# Altium PCB PCB.PcbDoc (part 1 of 2)
Units mm, origin at the board's own origin, x right, y up, seen from the top; angles counter-clockwise.
Board outline 25 x 40 mm, 4 copper layers (L1-Sig, L2-Gnd, L3-Gnd, L4-Sig), stack 1.591 mm thick; 54 components, 44 nets, 207 pads, 194 vias.
Unrouted connection lines stored in the file: 1.
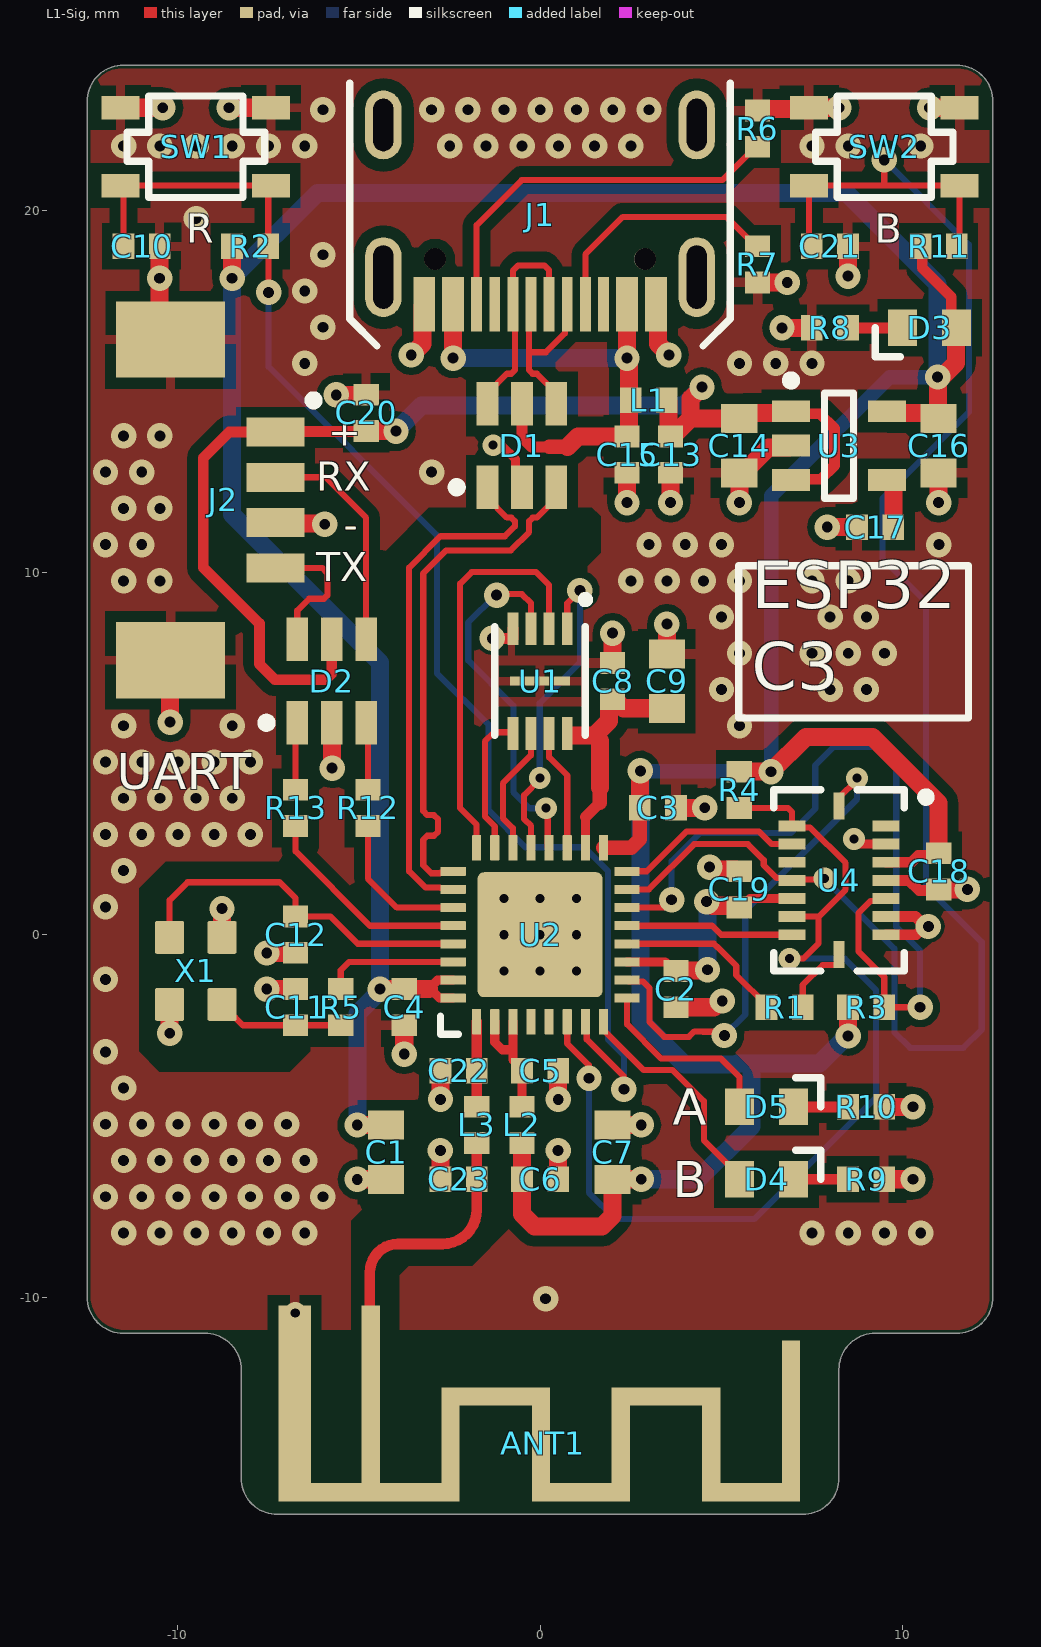
[diagram p0: L1-Sig view]
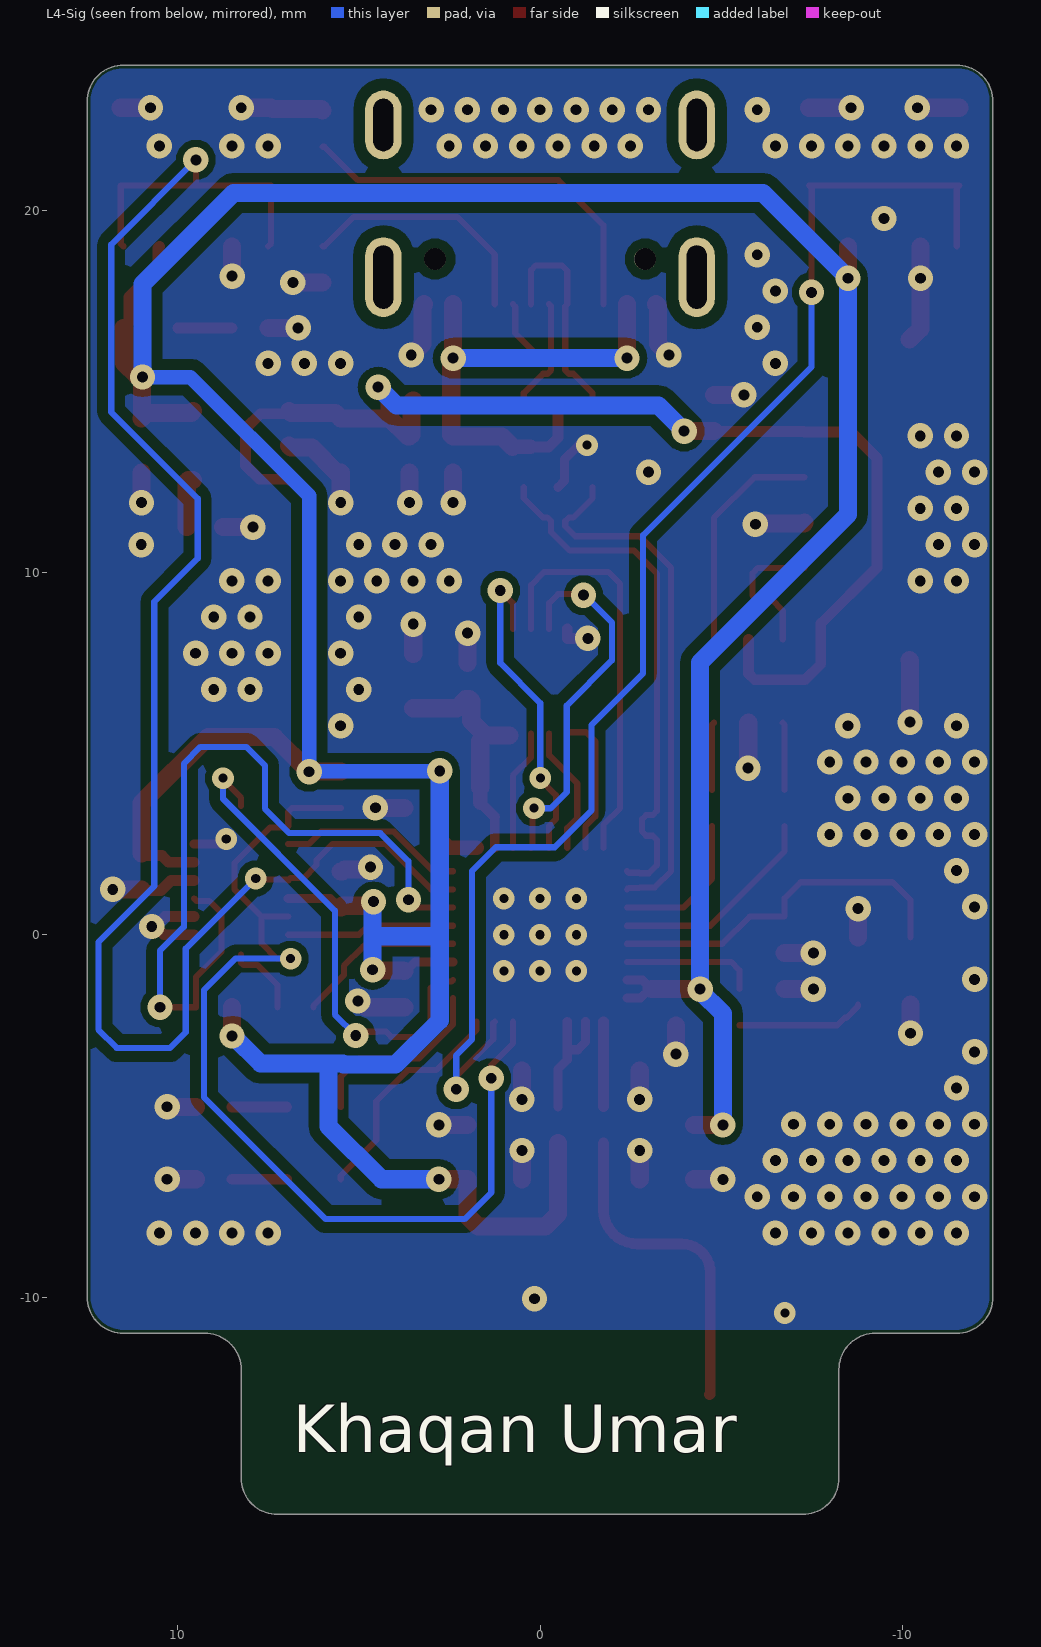
[diagram p1: L4-Sig view, seen from below]
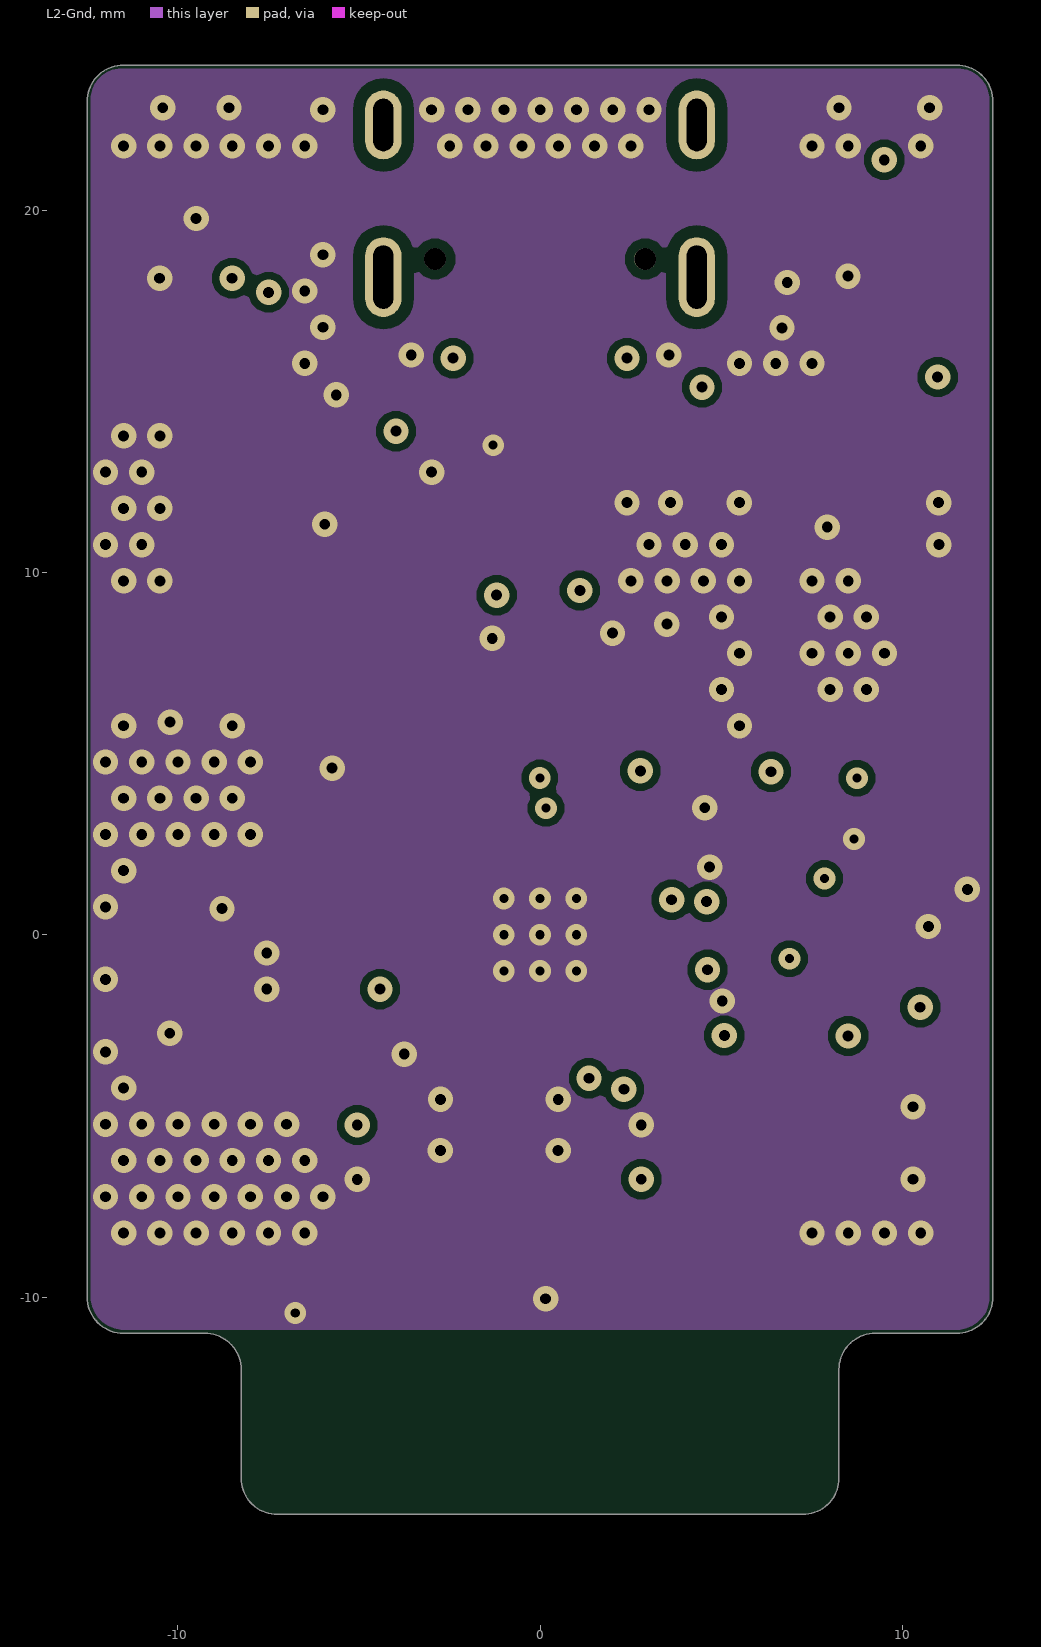
[diagram p2: L2-Gnd]
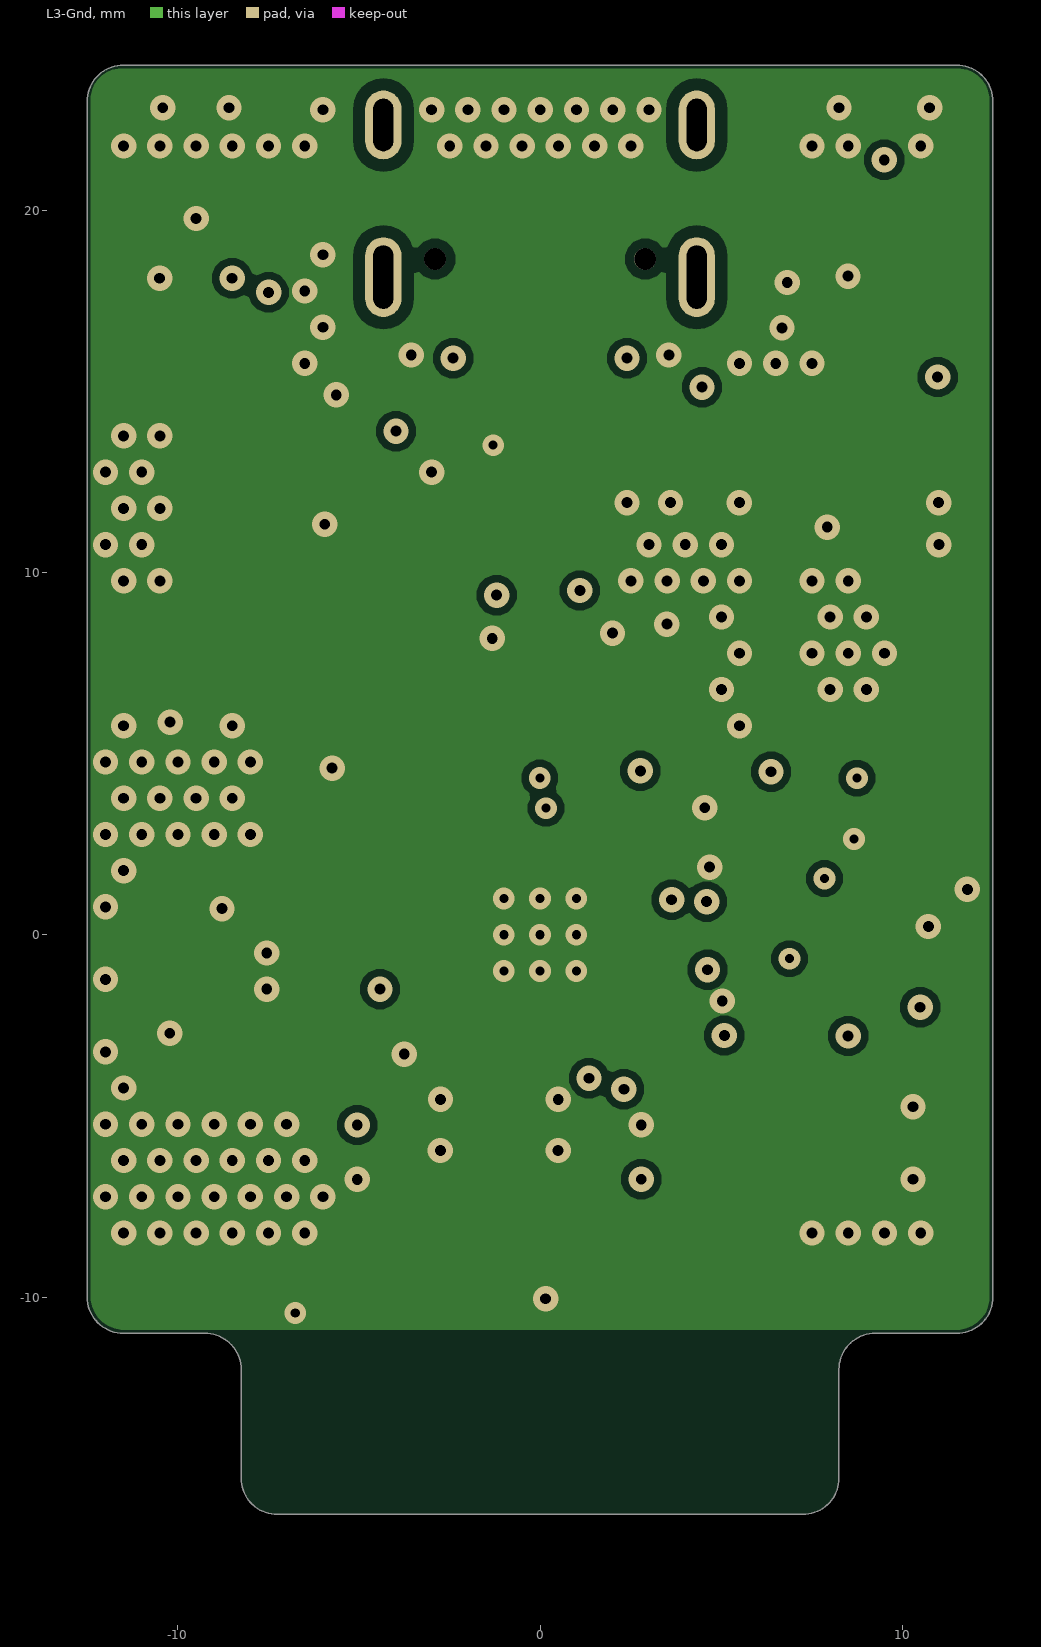
[diagram p3: L3-Gnd]
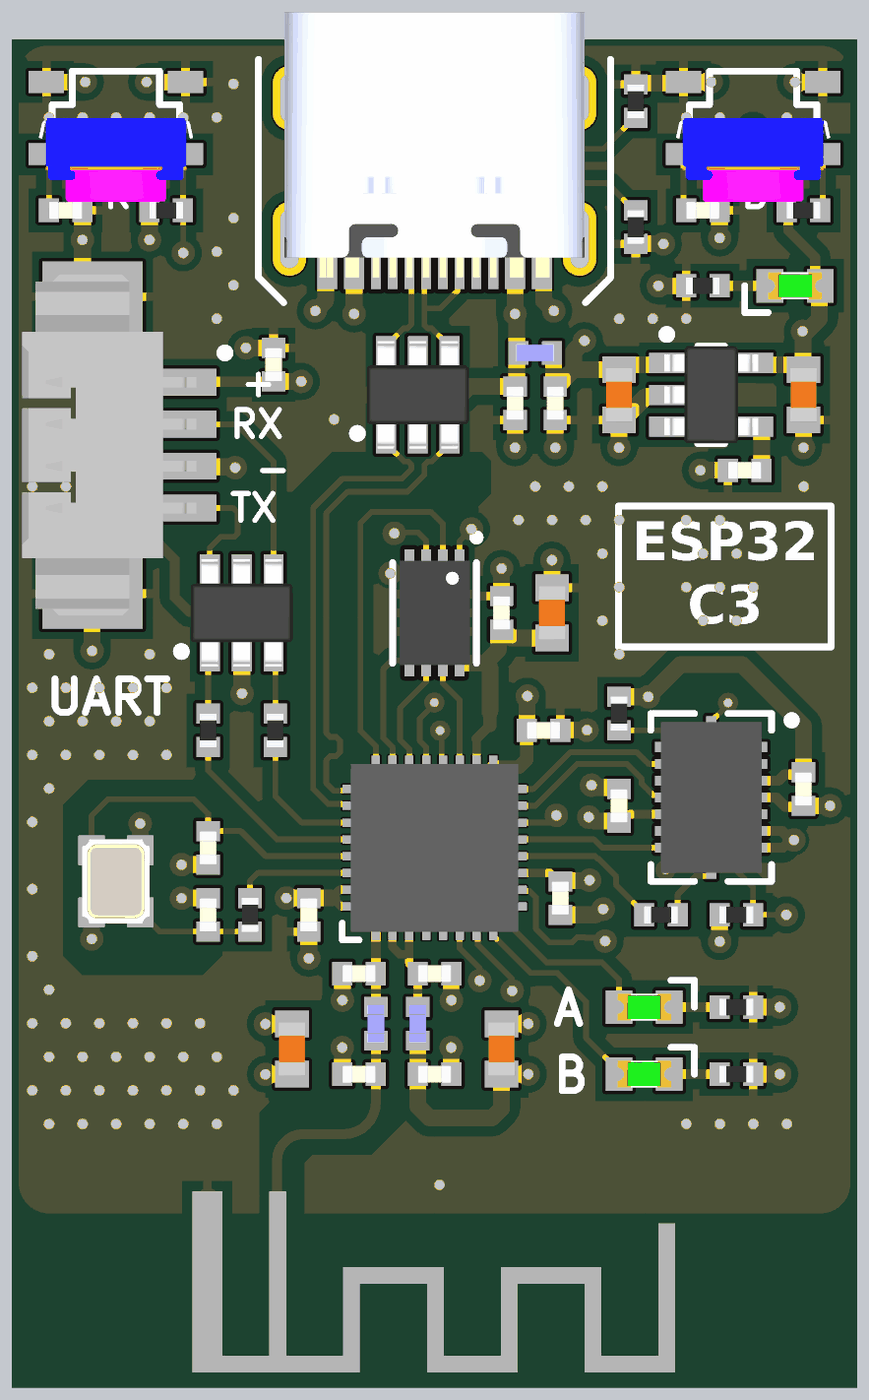
[diagram p4: 3D render of the assembled board from above, using the file's embedded part models]

## Layer stack, top to bottom
Top Solder: solder mask 0.0254, SM-001, Dk 4
L1-Sig: signal copper 0.035
Dielectric 1: prepreg 0.2104, PP-017, Dk 4.6
L2-Gnd: signal copper 0.0175
Dielectric 3: core 1.065, Core-039, Dk 4.6
L3-Gnd: signal copper 0.0175
Dielectric 5: prepreg 0.2104, PP-017, Dk 4.6
L4-Sig: signal copper 0.035
Bottom Solder: solder mask 0.0254, SM-001, Dk 4

## Board outline
-8.25,-15 -8.25,-12 ccw(c-9.25,-12) -9.25,-11 -11.5,-11 cw(c-11.5,-10) -12.5,-10 -12.5,23 cw(c-11.5,23) -11.5,24 11.5,24 cw(c11.5,23) 12.5,23 12.5,-10 cw(c11.5,-10) 11.5,-11 9.25,-11 ccw(c9.25,-12) 8.25,-12 8.25,-15 cw(c7.25,-15) 7.25,-16 -7.25,-16 cw(c-7.25,-15)

## Design rules (kind name [scope] priority, off if disabled: settings)
Clearance [All] p1: gap=0.15 ignorepadtopadclearanceinfootprint=FALSE except(0.2: Arc-Via Track-Via Via-Fill Via-Poly Via-Region; 0.254: Arc-Hole Track-Hole SMDPad-Hole THPad-Hole Via-Via Via-Hole Fill-Hole Poly-Hole Region-Hole; 0.3: Arc-Fill Arc-Poly Arc-Region Track-Fill Track-Poly Track-Region SMDPad-Fill SMDPad-Poly SMDPad-Region Fill-Fill Fill-Poly Fill-Region Poly-Poly Poly-Region Region-Region; 0.33: Arc-THPad Track-THPad THPad-Fill THPad-Poly THPad-Region)
DiffPairsRouting [InDifferentialPairClass('DIFF90')] p1: maxlimit=0.22 minlimit=0.127 mostfreqgap=0.22 toplayer_mingap=0.22 toplayer_minwidth=0.17 toplayer_maxwidth=0.17 toplayer_prefwidth=0.17 bottomlayer_mingap=0.22 bottomlayer_minwidth=0.17 bottomlayer_maxwidth=0.17 bottomlayer_prefwidth=0.17 impedanceprofiledriven=TRUE impedanceprofileid={43D1026E-E55F-46A2-96F1-A78F2004043C} impedanceprofilevalue=90.000000 maxuncoupledlength=12.7
MatchedLengths DiffPair_MatchedLengths [InDifferentialPair ('MCU_USB_D')] p1: tolerance=25.4 checknetsindiffpair=FALSE checkdiffpairvsdiffpair=TRUE checkxsignals=TRUE checkothers=TRUE
PolygonConnect [All] p1: thpad.connectstyle=Relief thpad.reliefconductorwidth=0.254 thpad.reliefentries=4 thpad.polygonreliefangle="90 Angle" thpad.airgapwidth=0.3 smdpad.connectstyle=Relief smdpad.reliefconductorwidth=0.254 smdpad.reliefentries=4 smdpad.polygonreliefangle="90 Angle" smdpad.airgapwidth=0.3 via.connectstyle=Direct via.reliefconductorwidth=0.254 via.reliefentries=4 via.polygonreliefangle="90 Angle" via.airgapwidth=0.254
RoutingVias [All] p1: holewidth=0.3 width=0.7 viastyle="Through Hole" minholewidth=0.3 minwidth=0.7 maxholewidth=0.4 maxwidth=0.8
SolderMaskExpansion [All] p1: expansion=0.102 istentingtop=FALSE
SupplyNets "Schematic Supply Nets_4" [InNet('VCC_SPI')] p1: voltage=0.000
SupplyNets "Schematic Supply Nets_3" [InNet('+VBUS')] p2: voltage=0.000
SupplyNets "Schematic Supply Nets_2" [InNet('+VBUS_FILT')] p3: voltage=0.000
SupplyNets "Schematic Supply Nets_1" [InNet('+3V3')] p4: voltage=0.000
SupplyNets "Schematic Supply Nets" [InNet('GND')] p5: voltage=0.000
Width Width_1 [InNetClass('Power')] p1: maxlimit=1 minlimit=0.15 preferedwidth=0.5
Width [All] p2: maxlimit=1 minlimit=0.15 preferedwidth=0.17
29 further rules are at their usual default settings.

## Classes and differential pairs
differential pair class DIFF90: MCU_USB_D USB_D
differential pair USB_D: +USB_D_P -USB_D_N
differential pair MCU_USB_D: +MCU_USB_D_P -MCU_USB_D_N

## Components (designator, comment, footprint, x,y, rotation, side; value= is the part's Value field where it differs from the comment)
ANT1 "PCB Antenna 2.4GHz 50Ohm" ANT_IFA_USB_2_4GHZ_50R -6.775,-10.238 r0 top locked
C1 "10uF" CAP_0603 -4.25,-6 r90 top value=10µF
C2 "100nF" CAP_0402 3.75,-1.5 r90 top
C3 "100nF" CAP_0402 3.25,3.5 r180 top
C4 "100nF" CAP_0402 -3.75,-2 r90 top
C5 "100nF" CAP_0402 0,-3.75 r180 top
C6 "100nF" CAP_0402 0,-6.75 r180 top
C7 "10uF" CAP_0603 2,-6 r270 top value=10µF
C8 "100nF" CAP_0402 2,7 r270 top
C9 "10uF" CAP_0603 3.5,7 r270 top value=10µF
C10 "100nF" CAP_0402 -11,19 r180 top
C11 "10pF" CAP_0402 -6.75,-2 r270 top
C12 "10pF" CAP_0402 -6.75,0 r90 top
C13 "100nF" CAP_0402 3.6,13.25 r90 top
C14 "10uF" CAP_0603 5.5,13.5 r90 top value=10µF
C15 "100nF" CAP_0402 2.4,13.25 r90 top
C16 "10uF" CAP_0603 11,13.5 r90 top value=10µF
C17 "100nF" CAP_0402 9.25,11.25 r0 top
C18 "100nF" CAP_0402 11,1.75 r90 top
C19 "100nF" CAP_0402 5.5,1.25 r270 top
C20 "100nF" CAP_0402 -4.8,14.4 r270 top
C21 "100nF" CAP_0402 8,19 r180 top
C22 "3p3" CAP_0402 -2.25,-3.75 r0 top
C23 "3p3" CAP_0402 -2.25,-6.75 r0 top
D1 "USBLC6-2SC6" USBLC6-2SC6 -0.5,13.5 r90 top locked value=2.5pF
D2 "USBLC6-2SC6" USBLC6-2SC6 -5.75,7 r90 top locked value=2.5pF
D3 "16-213/GHC-YR1S1/3T" LED_0402_GREEN_SMD 10.75,16.75 r0 top
D4 "16-213/GHC-YR1S1/3T" LED_0402_GREEN_SMD 6.25,-6.75 r180 top
D5 "16-213/GHC-YR1S1/3T" LED_0402_GREEN_SMD 6.25,-4.75 r180 top
J1 "TYPE-C-31-M-12" TYPE-C-31-M-12 0,20.25 r180 top locked
J2 "53261-0471" MOLEX-53261-0471_V -8.75,12 r270 top locked
L1 "2n2" IND_SMD_0402 3,14.75 r0 top
L2 "2n2" IND_SMD_0402 -0.5,-5.25 r270 top
L3 "2n2" IND_SMD_0402 -1.75,-5.25 r270 top
R1 "22R" RES_0402 6.75,-2 r180 top
R2 "5.1k" RES_0402 -8,19 r180 top
R3 "5.1k" RES_0402 9,-2 r180 top
R4 "5.1k" RES_0402 5.5,4 r90 top
R5 "22R" RES_0402 -5.5,-2 r270 top
R6 "5.1k" RES_0402 6,22.25 r270 top
R7 "5.1k" RES_0402 6,18.5 r90 top
R8 "1k" RES_0402 8,16.75 r0 top
R9 "1k" RES_0402 9,-6.75 r180 top
R10 "1k" RES_0402 9,-4.75 r180 top
R11 "5.1k" RES_0402 11,19 r180 top
R12 "470R" RES_0402 -4.75,3.5 r270 top
R13 "470R" RES_0402 -6.75,3.5 r270 top
SW1 "SKRPACE010" "Tactile Switch" -9.5,21.75 r180 top
SW2 "SKRPACE010" "Tactile Switch" 9.5,21.75 r180 top
U1 "W25Q16JVUXIQ" W25Q16JVUXIQ 0,7 r270 top locked
U2 "ESP32-C3" ESP32-C3 0,0 r90 top locked
U3 "SPX3819M5-L-3-3/TR" SPX3819M5-L-3-3/TR 8.25,13.5 r0 top locked
U4 "BMI055" BMI055 8.25,1.5 r270 top locked
X1 "40MHz" XTAL_40MHZ_2520 -9.5,-1 r270 top locked

## Footprints (in the part's own frame and the unit in brackets; to place one, negate y for a bottom-side part, rotate by r counter-clockwise, add the part's x,y. Pads: shape width x height; smd on the part's side, far side on the other; paste and mask are expansions set on the pad)
ANT_IFA_USB_2_4GHZ_50R [mm]
  rect 5x0.5 smd paste+0 mask+0.102: 1(2.05,-5.15)
  rect 0.5x4.9 smd paste+0 mask+0.102: 1(2.1,-2.45)
  rect 0.5x2.64 smd paste+0 mask+0.102: 1(4.3,-3.58) 1(6.8,-3.58) 1(9,-3.58) 1(11.5,-3.58)
  rect 2x0.5 smd paste+0 mask+0.102: 1(5.55,-2.51) 1(10.25,-2.51)
  rect 2.7x0.5 smd paste+0 mask+0.102: 1(7.9,-5.15) 1(12.6,-5.15)
  rect 0.5x3.94 smd paste+0 mask+0.102: 1(13.7,-2.93)
  rect 0.9x4.9 smd paste+0 mask+0.102: 2(0,-2.45)
BMI055 [mm] "LGA-16(3x4.5) Accelerometers RoHS"
  rect 0.3x0.75 smd: 1(-1.5,1.3) 2(-1,1.3) 3(-0.5,1.3) 4(0,1.3) 5(0.5,1.3) 6(1,1.3) 7(1.5,1.3) 9(1.5,-1.3) 10(1,-1.3) 11(0.5,-1.3) 12(0,-1.3) 13(-0.5,-1.3) 14(-1,-1.3) 15(-1.5,-1.3)
  rect 0.75x0.3 smd: 8(2.05,0) 16(-2.05,0)
  silkscreen extent -2.5,-1.8 2.5,2.51, body extent -2.25,-1.5 2.25,1.5, height 1.01
CAP_0402 [mm]
  rect 0.6x0.7 smd: 1(-0.5,0) 2(0.5,0)
  body extent -0.5,-0.26 0.5,0.26, height 0.37
CAP_0603 [mm]
  rect 0.8x1 smd: 1(-0.75,0) 2(0.75,0)
  body extent -0.8,-0.4 0.8,0.4, height 0.51
ESP32-C3 [mm] "400KB 22 3V~3.6V RISC-V 160MHz QFN-32-EP(5x5) Microcontroller Units (MCUs/MPUs/SOCs) ROHS"
  rrect10% 0.7x0.25 smd mask+0.05: 1(-2.4,1.75) 2(-2.4,1.25) 3(-2.4,0.75) 4(-2.4,0.25) 5(-2.4,-0.25) 6(-2.4,-0.75) 7(-2.4,-1.25) 8(-2.4,-1.75) 17(2.4,-1.75) 18(2.4,-1.25) 19(2.4,-0.75) 20(2.4,-0.25) 21(2.4,0.25) 22(2.4,0.75) 23(2.4,1.25) 24(2.4,1.75)
  rrect10% 0.25x0.7 smd mask+0.05: 9(-1.75,-2.4) 10(-1.25,-2.4) 11(-0.75,-2.4) 12(-0.25,-2.4) 13(0.25,-2.4) 14(0.75,-2.4) 15(1.25,-2.4) 16(1.75,-2.4) 25(1.75,2.4) 26(1.25,2.4) 27(0.75,2.4) 28(0.25,2.4) 29(-0.25,2.4) 30(-0.75,2.4) 31(-1.25,2.4) 32(-1.75,2.4)
  rrect10% 3.45x3.45 smd mask+0.07: 33(0,0)
  silkscreen extent -2.75,2.25 -2.25,2.75, body extent -2.5,-2.5 2.5,2.5, height 0.85
IND_SMD_0402 [mm] "IND_SMD_0402"
  rect 0.6x0.7 smd: 1(-0.5,0) 2(0.5,0)
  body extent -0.56,-0.26 0.56,0.26, height 0.67
LED_0402_GREEN_SMD [mm] "Emerald Green 518nm LED Indication - Discrete 0402"
  rect 0.8x1 smd: A(0.75,0) K(-0.75,0)
  silkscreen extent -1.5,-0.8 -0.8,0, body extent -0.8,-0.4 0.8,0.4, height 0.6
MOLEX-53261-0471_V [mm]
  rect 0.8x1.6 smd: 1(-1.875,1.45) 2(-0.625,1.45) 3(0.625,1.45) 4(1.875,1.45)
  rect 2.1x3 smd: MP1(-4.425,-1.45) MP2(4.425,-1.45)
  silkscreen extent -2.87,2.38 -2.63,2.63, body extent -5.08,-3.55 5.07,1.65, height 3.4
RES_0402 [mm]
  rect 0.6x0.7 smd: 1(-0.5,0) 2(0.5,0)
  body extent -0.5,-0.25 0.5,0.25, height 0.3
SPX3819M5-L-3-3/TR [mm] "16V Positive Fixed 3.3V SOT-23-5 Voltage Regulators - Linear, Low Drop Out (LDO) Regulators RoHS"
  rect 1.05x0.6 smd: 1(-1.325,0.95) 2(-1.325,0) 3(-1.325,-0.95) 4(1.325,-0.95) 5(1.325,0.95)
  silkscreen extent -1.45,-1.45 0.4,1.92, body extent -1.4,-1.45 1.4,1.45, height 1.45
"Tactile Switch" [mm] "Tactile Switch SPST-NO Top Actuated Surface Mount"
  rect 1.05x0.65 smd: 12(-2.075,1.075) 12(2.075,1.075) 34(-2.075,-1.075) 34(2.075,-1.075)
  silkscreen extent -1.9,-1.4 1.9,1.4, body extent -2.3,-1.6 2.3,1.6, height 2.51
TYPE-C-31-M-12 [mm] "USB-C (USB TYPE-C) Receptacle Connector 16 Position Surface Mount"
  rect 0.6x1.5 smd mask+0.07: A1B12(-3.2,2.85) B1A12(3.2,2.85)
  rect 0.6x1.5 smd mask+0.14: A4B9(-2.4,2.85) B4A9(2.4,2.85)
  rect 0.3x1.5 smd mask+0.14: A5(-1.25,2.85) A6(-0.25,2.85) A7(0.25,2.85) A8(1.25,2.85) B5(1.75,2.85) B6(0.75,2.85) B7(-0.75,2.85) B8(-1.75,2.85)
  round 0.6 hole 0.6 unplated mask+0.3: MH(-2.9,1.6) MH(2.9,1.6)
  oval 1x1.9 hole 0.55 slot 1.45 at 90 deg mask+0.05: SH(-4.325,-2.1) SH(4.325,-2.1)
  oval 1x2.2 hole 0.55 slot 1.75 at 90 deg mask+0.05: SH(-4.325,2.1) SH(4.325,2.1)
  silkscreen extent -5.25,-3.25 5.25,4, body extent -4.47,-4.65 4.47,3.25, height 3.32
USBLC6-2SC6 [mm] "5A 17V 6V Unidirectional 5.25V SOT-23-6L TVS Diodes RoHS"
  rect 1.2x0.6 smd: 1(-1.15,0.95) 2(-1.15,0) 3(-1.15,-0.95) 4(1.15,-0.95) 5(1.15,0) 6(1.15,0.95)
  silkscreen extent -1.27,1.68 -1.03,1.92, body extent -1.6,-1.53 1.6,1.53, height 1.45
W25Q16JVUXIQ [mm] "16Mbit 2.7V~3.6V 133MHz SPI USON-8-EP(2x3) Memory (ICs) RoHS"
  rect 0.9x0.3 smd mask+0.13: 1(-1.445,0.75) 2(-1.445,0.25) 3(-1.445,-0.25) 4(-1.445,-0.75) 5(1.445,-0.75) 6(1.445,-0.25) 7(1.445,0.25) 8(1.445,0.75)
  rect 0.25x1.65 smd paste-0.1: 9(0,0)
  silkscreen extent -2.35,-1.25 1.5,1.35, body extent -1.55,-1.05 1.55,1.05, height 0.6
XTAL_40MHZ_2520 [mm] "Crystal SMD 2520"
  rrect10% 0.9x0.8 smd mask+0: 1(0.925,0.725) 2(-0.925,0.725) 3(-0.925,-0.725) 4(0.925,-0.725)
  body extent -1.25,-1 1.25,1, height 0.8

## Part data
ANT1: library part ANT_IFA_USB_2_4GHz_50R, "Inverted F 2.4GHz ISM PCB Antenna 50Ohm"
C1 C7 C9 C14 C16: library part CAP_0603, "Ceramic Capacitor, Multilayer, Ceramic, 10V, 10% +Tol, 10% -Tol, X5R, +-15% TC, 10uF, Surface Mount, 0603 inch", Case Code (Imperial)=0603, Case Code (Metric)=1608, Dielectric=X5R, Dielectric Material=Ceramic, LCSC=C19702, Manufacturer="Samsung Electro-Mechanics", Manufacturer Part Number=CL10A106KP8NNNC, Max Operating Temperature=85°C, Min Operating Temperature=-55°C, Supplier Part Number=1276-1192-1-ND, Tolerance=10%, Voltage Rating=10V, Case/Package=0603, Category="Ceramic Capacitors", China RoHS=Compliant, ComponentLink1Description=https://datasheet.octopart.com:443/CL10A106KP8NNNC-Samsung-Electro-Mechanics-datasheet-181960519.pdf?src-supplier=Newark, ComponentLink1URL=https://datasheet.octopart.com:443/CL10A106KP8NNNC-Samsung-Electro-Mechanics-datasheet-181960519.pdf?src-supplier=Newark, ComponentLink2Description=https://datasheet.octopart.com/CL10A106KP8NNNC-Samsung-Electro-Mechanics-datasheet-8324245.pdf, ComponentLink2URL=https://datasheet.octopart.com/CL10A106KP8NNNC-Samsung-Electro-Mechanics-datasheet-8324245.pdf, ComponentLink3Description=https://datasheet.octopart.com/CL10A106KP8NNNC-Samsung-Electro-Mechanics-datasheet-97040617.pdf, ComponentLink3URL=https://datasheet.octopart.com/CL10A106KP8NNNC-Samsung-Electro-Mechanics-datasheet-97040617.pdf, ComponentLink4Description=https://datasheet.octopart.com:443/CL10A106KP8NNNC-Samsung-Electro-Mechanics-datasheet-136031754.pdf?src-supplier=Future+Electronics, ComponentLink4URL=https://datasheet.octopart.com:443/CL10A106KP8NNNC-Samsung-Electro-Mechanics-datasheet-136031754.pdf?src-supplier=Future+Electronics, ComponentLink5Description=https://datasheet.octopart.com:443/CL10A106KP8NNNC-Samsung-Electro-Mechanics-datasheet-110226289.pdf?src-supplier=Future+Electronics, ComponentLink5URL=https://datasheet.octopart.com:443/CL10A106KP8NNNC-Samsung-Electro-Mechanics-datasheet-110226289.pdf?src-supplier=Future+Electronics, ComponentLink6Description=https://datasheet.octopart.com:443/CL10A106KP8NNNC-Samsung-Electro-Mechanics-datasheet-81461787.pdf?src-supplier=Future+Electronics, ComponentLink6URL=https://datasheet.octopart.com:443/CL10A106KP8NNNC-Samsung-Electro-Mechanics-datasheet-81461787.pdf?src-supplier=Future+Electronics, ComponentLink7Description=https://datasheet.octopart.com:443/CL10A106KP8NNNC-Samsung-datasheet-48647232.pdf?src-supplier=Future+Electronics, ComponentLink7URL=https://datasheet.octopart.com:443/CL10A106KP8NNNC-Samsung-datasheet-48647232.pdf?src-supplier=Future+Electronics, ComponentLink8Description=https://datasheet.octopart.com:443/CL10A106KP8NNNC-Samsung-datasheet-34157262.pdf?src-supplier=Future+Electronics, ComponentLink8URL=https://datasheet.octopart.com:443/CL10A106KP8NNNC-Samsung-datasheet-34157262.pdf?src-supplier=Future+Electronics, ComponentLink9Description=https://datasheet.octopart.com:443/CL10A106KP8NNNC-Samsung-datasheet-26589120.pdf?src-supplier=Future+Electronics, ComponentLink9URL=https://datasheet.octopart.com:443/CL10A106KP8NNNC-Samsung-datasheet-26589120.pdf?src-supplier=Future+Electronics, ComponentLink10Description=https://datasheet.octopart.com:443/CL10A106KP8NNNC-Samsung-Electro-Mechanics-datasheet-149156481.pdf?src-supplier=Future+Electronics, ComponentLink10URL=https://datasheet.octopart.com:443/CL10A106KP8NNNC-Samsung-Electro-Mechanics-datasheet-149156481.pdf?src-supplier=Future+Electronics, ComponentLink11Description=https://datasheet.octopart.com:443/CL10A106KP8NNNC-Samsung-Electro-Mechanics-datasheet-11968064.pdf?src-supplier=Arrow+Electronics, ComponentLink11URL=https://datasheet.octopart.com:443/CL10A106KP8NNNC-Samsung-Electro-Mechanics-datasheet-11968064.pdf?src-supplier=Arrow+Electronics, ComponentLink12Description=https://datasheet.octopart.com:443/CL10A106KP8NNNC-Samsung-datasheet-8326407.pdf?src-supplier=TME, ComponentLink12URL=https://datasheet.octopart.com:443/CL10A106KP8NNNC-Samsung-datasheet-8326407.pdf?src-supplier=TME, Contact Plating=Tin, Depth=800µm, Height=800µm, Lead Free="Lead Free", Length=1.6mm, Lifecycle Status=Production, Material=Ceramic, Mounting Technology="Surface Mount", Number of Terminals=2, Pricing="1=0.08, 10=0.027 (USD)", Radiation Hardening=No, REACH SVHC=Yes, RoHS=Compliant, Schedule B="8532240020, 8532240020|8532240020|8532240020|8532240020|8532240020|8532240020|8532240020|8532240020|8532240020|8532240020|8532240020|8532240020|8532240020|8532240020|8532240020|8532240020|8532240020|8532240020|8532240020|8532240020|8532240020|8532240020|8532240020|85", Stock=3199651, Supplier=DigiKey, Thickness=889µm, Voltage Rating (DC)=10V, Width=800µm
C2 C3 C4 C5 C6 C8 C10 C13 C15 C17 C18 C19 C20 C21: library part CAP_0402, "Ceramic Capacitor, Multilayer, Ceramic, 16V, 10% +Tol, 10% -Tol, X7R, +-15% TC, 100nF, Surface Mount, 0402 inch", Case Code (Imperial)=0402, Case Code (Metric)=1005, Dielectric=X7R, Dielectric Material=Ceramic, LCSC=C1525, Manufacturer="Samsung Electro-Mechanics", Manufacturer Part Number=CL05B104KO5NNNC, Max Operating Temperature=125°C, Min Operating Temperature=-55°C, Supplier Part Number=1276-1001-1-ND, Tolerance=10%, Voltage=16V, Case/Package=0402, Category="Ceramic Capacitors", China RoHS=Compliant, ComponentLink1Description=https://datasheet.octopart.com:443/CL05B104KO5NNNC-Samsung-Electro-Mechanics-datasheet-181960518.pdf?src-supplier=IHS, ComponentLink1URL=https://datasheet.octopart.com:443/CL05B104KO5NNNC-Samsung-Electro-Mechanics-datasheet-181960518.pdf?src-supplier=IHS, ComponentLink2Description=https://datasheet.octopart.com:443/CL05B104KO5NNNC-Samsung-Electro-Mechanics-datasheet-81461623.pdf?src-supplier=Upverter, ComponentLink2URL=https://datasheet.octopart.com:443/CL05B104KO5NNNC-Samsung-Electro-Mechanics-datasheet-81461623.pdf?src-supplier=Upverter, ComponentLink3Description=https://datasheet.octopart.com/CL05B104KO5NNNC-Samsung-Electro-Mechanics-datasheet-8324245.pdf, ComponentLink3URL=https://datasheet.octopart.com/CL05B104KO5NNNC-Samsung-Electro-Mechanics-datasheet-8324245.pdf, ComponentLink4Description=https://datasheet.octopart.com/CL05B104KO5NNNC-Samsung-Electro-Mechanics-datasheet-97040617.pdf, ComponentLink4URL=https://datasheet.octopart.com/CL05B104KO5NNNC-Samsung-Electro-Mechanics-datasheet-97040617.pdf, ComponentLink5Description=https://datasheet.octopart.com:443/CL05B104KO5NNNC-Samsung-Electro-Mechanics-datasheet-141346863.pdf?src-supplier=Samsung+SCT, ComponentLink5URL=https://datasheet.octopart.com:443/CL05B104KO5NNNC-Samsung-Electro-Mechanics-datasheet-141346863.pdf?src-supplier=Samsung+SCT, ComponentLink6Description=https://datasheet.octopart.com:443/CL05B104KO5NNNC-Samsung-datasheet-151956582.pdf?src-supplier=SOS+electronic, ComponentLink6URL=https://datasheet.octopart.com:443/CL05B104KO5NNNC-Samsung-datasheet-151956582.pdf?src-supplier=SOS+electronic, ComponentLink7Description=https://datasheet.octopart.com:443/CL05B104KO5NNNC-Samsung-datasheet-42485123.pdf?src-supplier=Future+Electronics, ComponentLink7URL=https://datasheet.octopart.com:443/CL05B104KO5NNNC-Samsung-datasheet-42485123.pdf?src-supplier=Future+Electronics, ComponentLink8Description=https://datasheet.octopart.com:443/CL05B104KO5NNNC-Samsung-datasheet-34153835.pdf?src-supplier=Future+Electronics, ComponentLink8URL=https://datasheet.octopart.com:443/CL05B104KO5NNNC-Samsung-datasheet-34153835.pdf?src-supplier=Future+Electronics, ComponentLink9Description=https://datasheet.octopart.com:443/CL05B104KO5NNNC-Samsung-datasheet-26589024.pdf?src-supplier=Future+Electronics, ComponentLink9URL=https://datasheet.octopart.com:443/CL05B104KO5NNNC-Samsung-datasheet-26589024.pdf?src-supplier=Future+Electronics, ComponentLink10Description=https://datasheet.octopart.com:443/CL05B104KO5NNNC-Samsung-Electro-Mechanics-datasheet-149136714.pdf?src-supplier=Future+Electronics, ComponentLink10URL=https://datasheet.octopart.com:443/CL05B104KO5NNNC-Samsung-Electro-Mechanics-datasheet-149136714.pdf?src-supplier=Future+Electronics, ComponentLink11Description=https://datasheet.octopart.com:443/CL05B104KO5NNNC-Samsung-datasheet-59220082.pdf?src-supplier=TME, ComponentLink11URL=https://datasheet.octopart.com:443/CL05B104KO5NNNC-Samsung-datasheet-59220082.pdf?src-supplier=TME, Contact Plating=Tin, Depth=500µm, Height=500µm, Lead Free="Lead Free", Length=1mm, Lifecycle Status=Production, Material=Ceramic, Mounting Technology="Surface Mount", Number of Terminals=2, Pricing="1=0.08, 10=0.006, 50=0.006, 100=0.0056, 500=0.0048, 1000=0.0032 (USD)", Radiation Hardening=No, REACH SVHC=Yes, RoHS=Compliant, Schedule B="8532240020, 8532240020|8532240020|8532240020|8532240020|8532240020|8532240020|8532240020|8532240020|8532240020|8532240020|8532240020|8532240020|8532240020|8532240020|8532240020|8532240020|8532240020|8532240020|8532240020|8532240020|8532240020|8532240020|8532240020|85", Stock=9075, Supplier=DigiKey, Thickness=558.8µm, Voltage Rating=16V, Voltage Rating (DC)=16V, Width=500µm
C11 C12: library part CAP_0402, "Ceramic Capacitor, Multilayer, Ceramic, 50V, 5% +Tol, 5% -Tol, C0G, 0+-30ppm/Celcius TC, 10pF, Surface Mount, 0402 inch", Case Code (Imperial)=0402, Case Code (Metric)=1005, Dielectric=C0G, Dielectric Material=Ceramic, LCSC=C32949, Manufacturer="Samsung Electro-Mechanics", Manufacturer Part Number=CL05C100JB5NNNC, Max Operating Temperature=125°C, Min Operating Temperature=-55°C, Supplier Part Number=1276-1139-1-ND, Temperature Coefficient=30ppm/°C, Tolerance=5%, Voltage Rating=50V, Case/Package=0402, Category="Ceramic Capacitors", China RoHS=Compliant, ComponentLink1Description=https://datasheet.octopart.com:443/CL05C100JB5NNNC-Samsung-Electro-Mechanics-datasheet-136482242.pdf?src-supplier=IHS, ComponentLink1URL=https://datasheet.octopart.com:443/CL05C100JB5NNNC-Samsung-Electro-Mechanics-datasheet-136482242.pdf?src-supplier=IHS, ComponentLink2Description=https://datasheet.octopart.com:443/CL05C100JB5NNNC-Samsung-Electro-Mechanics-datasheet-11758155.pdf?src-supplier=Future+Electronics, ComponentLink2URL=https://datasheet.octopart.com:443/CL05C100JB5NNNC-Samsung-Electro-Mechanics-datasheet-11758155.pdf?src-supplier=Future+Electronics, ComponentLink3Description=https://datasheet.octopart.com:443/CL05C100JB5NNNC-Samsung-Electro-Mechanics-datasheet-110226242.pdf?src-supplier=Future+Electronics, ComponentLink3URL=https://datasheet.octopart.com:443/CL05C100JB5NNNC-Samsung-Electro-Mechanics-datasheet-110226242.pdf?src-supplier=Future+Electronics, ComponentLink4Description=https://datasheet.octopart.com:443/CL05C100JB5NNNC-Samsung-Electro-Mechanics-datasheet-81461703.pdf?src-supplier=Future+Electronics, ComponentLink4URL=https://datasheet.octopart.com:443/CL05C100JB5NNNC-Samsung-Electro-Mechanics-datasheet-81461703.pdf?src-supplier=Future+Electronics, ComponentLink5Description=https://datasheet.octopart.com:443/CL05C100JB5NNNC-Samsung-datasheet-12525757.pdf?src-supplier=Future+Electronics, ComponentLink5URL=https://datasheet.octopart.com:443/CL05C100JB5NNNC-Samsung-datasheet-12525757.pdf?src-supplier=Future+Electronics, ComponentLink6Description=https://datasheet.octopart.com:443/CL05C100JB5NNNC-Samsung-Electro-Mechanics-datasheet-149136756.pdf?src-supplier=Future+Electronics, ComponentLink6URL=https://datasheet.octopart.com:443/CL05C100JB5NNNC-Samsung-Electro-Mechanics-datasheet-149136756.pdf?src-supplier=Future+Electronics, ComponentLink7Description=https://datasheet.octopart.com:443/CL05C100JB5NNNC-Samsung-datasheet-37081328.pdf?src-supplier=Future+Electronics, ComponentLink7URL=https://datasheet.octopart.com:443/CL05C100JB5NNNC-Samsung-datasheet-37081328.pdf?src-supplier=Future+Electronics, ComponentLink8Description=https://datasheet.octopart.com/CL05C100JB5NNNC-Samsung-Electro-Mechanics-datasheet-97040617.pdf, ComponentLink8URL=https://datasheet.octopart.com/CL05C100JB5NNNC-Samsung-Electro-Mechanics-datasheet-97040617.pdf, ComponentLink9Description=https://datasheet.octopart.com/CL05C100JB5NNNC-Samsung-Electro-Mechanics-datasheet-8324245.pdf, ComponentLink9URL=https://datasheet.octopart.com/CL05C100JB5NNNC-Samsung-Electro-Mechanics-datasheet-8324245.pdf, ComponentLink10Description=https://datasheet.octopart.com:443/CL05C100JB5NNNC-Samsung-datasheet-59220082.pdf?src-supplier=TME, ComponentLink10URL=https://datasheet.octopart.com:443/CL05C100JB5NNNC-Samsung-datasheet-59220082.pdf?src-supplier=TME, Contact Plating=Tin, Depth=500µm, Height=550µm, Length=1mm, Lifecycle Status=Production, Material=Ceramic, Mounting Technology="Surface Mount", Number of Terminals=2, Pricing="1=0.08, 10=0.006, 50=0.0048 (USD)", Radiation Hardening=No, REACH SVHC=Yes, RoHS=Compliant, Schedule B="8532240020, 8532240020|8532240020, 8532240020|8532240020|8532240020, 8532240020|8532240020|8532240020|8532240020", Stock=68764, Supplier=DigiKey, Thickness=558.8µm, Voltage Rating (DC)=50V, Width=500µm
C22 C23: library part CAP_0402, "3.3pF 50V Ceramic Capacitor C0G 0402", LCSC=C1565, Manufacturer=FH, Manufacturer Part Number=0402CG3R3C500NT
D1 D2: "STMicroelectronics USBLC6-2SC6 TVS diode surge protection on full tape reel", Breakdown Voltage=6V, Case/Package=SOT-23, Clamping Voltage=17V, Forward Voltage=1.1V, LCSC=C7519, Leakage Current=150nA, Manufacturer=STMicroelectronics, Max Junction Temperature (Tj)=125°C, Max Repetitive Reverse Voltage (Vrrm)=5.25V, Min Operating Temperature=-40°C, Peak Pulse Current=5A, Power Line Protection=Yes, Reverse Standoff Voltage=5V, Supplier Part Number=497-5235-1-ND, Test Current=1mA, Category="TVS Diodes", China RoHS=Compliant, ComponentLink1Description=https://datasheet.octopart.com:443/USBLC6-2SC6-STMicroelectronics-datasheet-10412581.pdf?src-supplier=Newark, ComponentLink1URL=https://datasheet.octopart.com:443/USBLC6-2SC6-STMicroelectronics-datasheet-10412581.pdf?src-supplier=Newark, ComponentLink2Description=https://datasheet.octopart.com:443/USBLC6-2SC6-STMicroelectronics-datasheet-181961833.pdf?src-supplier=Newark, ComponentLink2URL=https://datasheet.octopart.com:443/USBLC6-2SC6-STMicroelectronics-datasheet-181961833.pdf?src-supplier=Newark, ComponentLink3Description=https://datasheet.octopart.com:443/USBLC6-2SC6-STMicroelectronics-datasheet-525477.pdf?src-supplier=Factory+Futures, ComponentLink3URL=https://datasheet.octopart.com:443/USBLC6-2SC6-STMicroelectronics-datasheet-525477.pdf?src-supplier=Factory+Futures, ComponentLink4Description=https://datasheet.octopart.com:443/USBLC6-2SC6-STMicroelectronics-datasheet-82998616.pdf?src-supplier=Farnell, ComponentLink4URL=https://datasheet.octopart.com:443/USBLC6-2SC6-STMicroelectronics-datasheet-82998616.pdf?src-supplier=Farnell, ComponentLink5Description=https://datasheet.octopart.com:443/USBLC6-2SC6-STMicroelectronics-datasheet-46285.pdf?src-supplier=Farnell, ComponentLink5URL=https://datasheet.octopart.com:443/USBLC6-2SC6-STMicroelectronics-datasheet-46285.pdf?src-supplier=Farnell, ComponentLink6Description=https://datasheet.octopart.com:443/USBLC6-2SC6-STMicroelectronics-datasheet-14050643.pdf?src-supplier=iiiC, ComponentLink6URL=https://datasheet.octopart.com:443/USBLC6-2SC6-STMicroelectronics-datasheet-14050643.pdf?src-supplier=iiiC, ComponentLink7Description=https://datasheet.octopart.com:443/USBLC6-2SC6-STMicroelectronics-datasheet-10521292.pdf?src-supplier=Jameco, ComponentLink7URL=https://datasheet.octopart.com:443/USBLC6-2SC6-STMicroelectronics-datasheet-10521292.pdf?src-supplier=Jameco, Contact Plating=Tin, Data Rate=480Mbps, Depth=1.75mm, Direction=Unidirectional, Element Configuration=Dual, ESD Protection=Yes, Height=1.45mm, Lead Free="Lead Free", Length=3.05mm, Lifecycle Status=Production, Manufacturer Part Number=USBLC6-2SC6, Max Breakdown Voltage=6V, Max Operating Temperature=125°C, Max Reverse Leakage Current=150nA, Min Breakdown Voltage=6V, Mounting Technology="Surface Mount", Number of Bidirectional Channels=2, Number of Channels=2, Number of Elements=1, Number of Terminals=6, Operating Supply Voltage=1.1V, Peak Reverse Current=150nA, Pins=6, Polarity=Unidirectional, Pricing="1=0.36, 10=0.243, 100=0.163, 500=0.127, 1000=0.114 (USD)", Radiation Hardening=No, REACH SVHC=Yes, Reverse Breakdown Voltage=6V, RoHS=Compliant, Schedule B="8536300000, 8536300000|8536300000|8536300000|8536300000|8536300000|8536300000|8536300000|8536300000|8536300000|8536300000|8536300000|8536300000|8536300000|8536300000|8536300000|8536300000|8536300000|8536300000|8536300000|8536300000|8536300000|8536300000|8536300000|85", Stock=156375, Supplier=DigiKey, Termination=SMD/SMT, Width=1.75mm, Working Voltage=5V
D3 D4 D5: library part LED_0402_GREEN_SMD, "Emerald Green 518nm LED Indication - Discrete 0402", LCSC=C74338, Manufacturer=EVERLIGHT, Manufacturer Part Number=16-213/GHC-YR1S1/3T
J1: "USB-C (USB TYPE-C) Receptacle Connector 16 Position Surface Mount", LCSC=C165948, Manufacturer="Korean Hroparts Elec", Manufacturer Part Number=TYPE-C-31-M-12
J2: library part CMP-2000-05238-1, "Male Header, Pitch 1.25 mm, 1 x 4 Position, Height 3.4 mm, -40 to 85 degC, RoHS, Tape and Reel", LCSC=C240847, Manufacturer=MOLEX, Manufacturer Part Number=532610471, Supplier Part Number 1=WM7622CT-ND, Supplier 1=DigiKey
L1 L2 L3: library part IND_SMD_0402, "IND_SMD_0402", LCSC=C412264, Manufacturer=muRata, Manufacturer Part Number=LQW15AN2N2G80D
R1 R5: library part RES_0402, "22Ω 62.5mW 50V ±100ppm/℃ Thick Film Resistor ±1% 0402 Chip Resistor - Surface Mount RoHS", LCSC=C25092, Manufacturer=UNI-ROYAL, Manufacturer Part Number=0402WGF220JTCE
R2 R3 R4 R11: library part RES_0402, "5.1kΩ 62.5mW 50V ±100ppm/℃ Thick Film Resistor ±1% 0402 Chip Resistor - Surface Mount RoHS", LCSC=C25905, Manufacturer=UNI-ROYAL, Manufacturer Part Number=0402WGF5101TCE
R6 R7: library part RES_0402, "5.1 kOhms ±5% 0.063W, 1/16W Chip Resistor 0402 (1005 Metric) Moisture Resistant Thick Film", LCSC=C105873, Manufacturer=YAGEO, Manufacturer Part Number=RC0402JR-075K1L
R8 R9 R10: library part RES_0402, "1kΩ ±1% 62.5mW 0402 Thick Film Resistor", LCSC=C11702, Manufacturer=UNI-ROYAL, Manufacturer Part Number=0402WGF1001TCE
R12 R13: library part RES_0402, "470Ω ±1% 62.5mW 0402 Thick Film Resistor", LCSC=C25117, Manufacturer=UNI-ROYAL, Manufacturer Part Number=0402WGF4700TCE
SW1 SW2: library part "Tactile Switch", "Switch Tactile N.O. SPST Button J-Bend 0.05A 16VDC 2.55N SMD T/R", Case/Package=SMD/SMT, Color=Natural, Contact Current Rating=50mA, Contact Resistance=500mΩ, Insulation Resistance=100MΩ, Manufacturer=ALPS, Max Operating Temperature=85°C, Max Voltage Rating (DC)=16V, Min Operating Temperature=-30°C, Operating Force=2.55N, Supplier Part Number=4809-SKRPACE010DKR-ND, Actuator Length=700µm, Category="Tactile Switches", ComponentLink1Description=https://datasheet.octopart.com:443/SKRPACE010-ALPS-datasheet-182234810.pdf?src-supplier=IHS, ComponentLink1URL=https://datasheet.octopart.com:443/SKRPACE010-ALPS-datasheet-182234810.pdf?src-supplier=IHS, ComponentLink2Description=https://datasheet.octopart.com:443/SKRPACE010-ALPS-datasheet-182235267.pdf?src-supplier=IHS, ComponentLink2URL=https://datasheet.octopart.com:443/SKRPACE010-ALPS-datasheet-182235267.pdf?src-supplier=IHS, ComponentLink3Description=https://datasheet.octopart.com:443/SKRPACE010-ALPS-datasheet-41327040.pdf?src-supplier=Master+Electronics, ComponentLink3URL=https://datasheet.octopart.com:443/SKRPACE010-ALPS-datasheet-41327040.pdf?src-supplier=Master+Electronics, ComponentLink4Description=https://datasheet.octopart.com:443/SKRPACE010-ALPS-datasheet-138899522.pdf?src-supplier=TME, ComponentLink4URL=https://datasheet.octopart.com:443/SKRPACE010-ALPS-datasheet-138899522.pdf?src-supplier=TME, ComponentLink5Description=https://datasheet.octopart.com:443/SKRPACE010-ALPS-datasheet-142045378.pdf?src-supplier=Arrow.cn, ComponentLink5URL=https://datasheet.octopart.com:443/SKRPACE010-ALPS-datasheet-142045378.pdf?src-supplier=Arrow.cn, ComponentLink6Description=https://datasheet.octopart.com:443/SKRPACE010-ALPS-datasheet-37145204.pdf?src-supplier=Electro+Sonic, ComponentLink6URL=https://datasheet.octopart.com:443/SKRPACE010-ALPS-datasheet-37145204.pdf?src-supplier=Electro+Sonic, Contact Plating=Silver, Current Rating=50mA, Depth=3.2mm, Electrical Life=50kcycles, Height=1.6mm, Lead Free="Lead Free", Length=4.2mm, Life (Cycles)=50kcycles, Lifecycle Status=Production, Manufacturer Part Number=SKRPACE010, Max Current Rating=50mA, Mounting Technology="Surface Mount", Number of Positions=1, Orientation=Straight, Packaging="Tape and Reel", Pricing="1=0.21, 10=0.179, 25=0.1684, 100=0.1511, 250=0.14016, 500=0.13228, 1000=0.12484 (USD)", Radiation Hardening=No, REACH SVHC=Yes, RoHS=Compliant, Schedule B=8536509065, Supplier=DigiKey, Termination=J-Bend, Throw Configuration=SPST, Voltage Rating (DC)=16V
U1: "NOR Flash Serial (SPI, Dual SPI, Quad SPI) 3V/3.3V 16M-bit 2M x 8 6ns 8-Pin USON EP T/R", LCSC=C2843335, Manufacturer=Winbond, Manufacturer Part Number="W25Q16JVUXIQ TR", Supplier Part Number=256-W25Q16JVUXIQTR-ND, Category=Memory, ComponentLink1Description=https://datasheet.octopart.com:443/W25Q16JVUXIQ-TR-Winbond-datasheet-165882617.pdf?src-supplier=ODG+(Origin+Data+Global), ComponentLink1URL=https://datasheet.octopart.com:443/W25Q16JVUXIQ-TR-Winbond-datasheet-165882617.pdf?src-supplier=ODG+(Origin+Data+Global), Pricing="4000=0.49661, 8000=0.48422, 12000=0.47705, 20000=0.46812 (USD)", Schedule B="8542320070, 8542320070|8542320070|8542320070|8542320070|8542320070", Stock=16000, Supplier=DigiKey
U2: "400KB 22 3V~3.6V RISC-V 160MHz QFN-32-EP(5x5) Microcontroller Units (MCUs/MPUs/SOCs) ROHS", LCSC=C2838500, Manufacturer="Espressif Systems", Max Operating Temperature=105°C, Max Supply Voltage=3.6V, Min Operating Temperature=-40°C, Min Supply Voltage=3V, Operating Supply Voltage=3.3V, Supplier Part Number=1904-ESP32-C3CT-ND, Category="System on Chip (SoC)", ComponentLink1Description=https://datasheet.octopart.com:443/ESP32-C3-Espressif-Systems-datasheet-156944166.pdf?src-supplier=IHS, ComponentLink1URL=https://datasheet.octopart.com:443/ESP32-C3-Espressif-Systems-datasheet-156944166.pdf?src-supplier=IHS, ComponentLink2Description=https://datasheet.octopart.com:443/ESP32-C3-Espressif-Systems-datasheet-188867343.pdf?src-supplier=TME, ComponentLink2URL=https://datasheet.octopart.com:443/ESP32-C3-Espressif-Systems-datasheet-188867343.pdf?src-supplier=TME, ComponentLink3Description=https://datasheet.octopart.com:443/ESP32-C3-Espressif-Systems-datasheet-165560559.pdf?src-supplier=TME, ComponentLink3URL=https://datasheet.octopart.com:443/ESP32-C3-Espressif-Systems-datasheet-165560559.pdf?src-supplier=TME, Height - Seated (Max)=900µm, Length=5mm, Manufacturer Part Number=ESP32-C3, Number of Terminals=32, Pricing="1=1 (USD)", Stock=2432, Supplier=DigiKey, Terminal Pitch=500µm, Width=5mm
U3: "SPX3819 Series 3.3 V 500 mA Fixed Output SMT LDO Regulator - SOT-23-5", Case/Package=SOT-23-5, Dropout Voltage=340mV, LCSC=C9055, Manufacturer=MaxLinear, Max Junction Temperature (Tj)=125°C, Max Output current=500mA, Max Supply Voltage=16V, Min Input Voltage=2.5V, Min Operating Temperature=-40°C, Min Output Voltage=3.3V, Output Voltage Accuracy=1%, Quiescent Current=3µA, Supplier Part Number=1016-1873-6-ND, Accuracy=1%, Category="LDO Voltage Regulators", ComponentLink1Description=https://datasheet.octopart.com:443/SPX3819M5-L-3-3-TR-MaxLinear-datasheet-164567055.pdf?src-supplier=ODG+(Origin+Data+Global), ComponentLink1URL=https://datasheet.octopart.com:443/SPX3819M5-L-3-3-TR-MaxLinear-datasheet-164567055.pdf?src-supplier=ODG+(Origin+Data+Global), ComponentLink2Description=https://datasheet.octopart.com:443/SPX3819M5-L-3-3-TR-MaxLinear-datasheet-68096079.pdf?src-supplier=IHS, ComponentLink2URL=https://datasheet.octopart.com:443/SPX3819M5-L-3-3-TR-MaxLinear-datasheet-68096079.pdf?src-supplier=IHS, ComponentLink3Description=https://datasheet.octopart.com:443/SPX3819M5-L-3-3-TR-MaxLinear-datasheet-136412968.pdf?src-supplier=LKR, ComponentLink3URL=https://datasheet.octopart.com:443/SPX3819M5-L-3-3-TR-MaxLinear-datasheet-136412968.pdf?src-supplier=LKR, ComponentLink4Description=https://datasheet.octopart.com:443/SPX3819M5-L-3-3-TR-Exar-datasheet-27092020.pdf?src-supplier=RS+(Formerly+Allied+Electronics), ComponentLink4URL=https://datasheet.octopart.com:443/SPX3819M5-L-3-3-TR-Exar-datasheet-27092020.pdf?src-supplier=RS+(Formerly+Allied+Electronics), ComponentLink5Description=https://datasheet.octopart.com:443/SPX3819M5-L-3-3/TR-Exar-datasheet-12510291.pdf?src-supplier=Future+Electronics, ComponentLink5URL=https://datasheet.octopart.com:443/SPX3819M5-L-3-3/TR-Exar-datasheet-12510291.pdf?src-supplier=Future+Electronics, ComponentLink6Description=https://datasheet.octopart.com:443/SPX3819M5-L-3-3/TR-Exar-datasheet-530831.pdf?src-supplier=Future+Electronics, ComponentLink6URL=https://datasheet.octopart.com:443/SPX3819M5-L-3-3/TR-Exar-datasheet-530831.pdf?src-supplier=Future+Electronics, ComponentLink7Description=https://datasheet.octopart.com:443/SPX3819M5-L-3-3-TR-Exar-datasheet-13046336.pdf?src-supplier=Future+Electronics, ComponentLink7URL=https://datasheet.octopart.com:443/SPX3819M5-L-3-3-TR-Exar-datasheet-13046336.pdf?src-supplier=Future+Electronics, ComponentLink8Description=https://datasheet.octopart.com:443/SPX3819M5-L-3-3/TR-Exar-datasheet-14171829.pdf?src-supplier=iiiC, ComponentLink8URL=https://datasheet.octopart.com:443/SPX3819M5-L-3-3/TR-Exar-datasheet-14171829.pdf?src-supplier=iiiC, Height=1.45mm, Height - Seated (Max)=1.45mm, Lead Free="Lead Free", Length=2.9mm, Lifecycle Status=Production, Manufacturer Part Number=SPX3819M5-L-3-3/TR, Max Operating Temperature=125°C, Min Supply Voltage=2.5V, Mounting Technology="Surface Mount", Number of Channels=1, Number of Circuits=1, Number of Outputs=1, Number of Regulators=1, Number of Terminals=5, Output Current=500mA, Output Type=Fixed, Output Voltage=3.3V, Packaging="Tape and Reel", Pins=5, Polarity=Positive, Pricing="1=0.44, 10=0.306, 25=0.2724, 100=0.2361, 250=0.21876, 500=0.2083, 1000=0.19968 (USD)", Radiation Hardening=No, REACH SVHC=Yes, RoHS=Compliant, Schedule B="8542310000, 8542310000|8542310000|8542310000|8542310000|8542310000", Stock=67889, Supplier=DigiKey, Terminal Pitch=950µm, Voltage Tolerance=1%, Width=1.6mm
U4: "LGA-16(3x4.5) Accelerometers RoHS", LCSC=C189620, Manufacturer=Bosch, Manufacturer Part Number=BMI055
X1: library part XTAL_40MHz_2520, "Crystal 40MHz ±10ppm (Tol) ±20ppm (Stability) 9pF FUND 40Ohm 4-Pin Ultra Mini-CSMD T/R", Case/Package=SMD/SMT, ESR (Equivalent Series Resistance)=40Ω, Frequency Stability=20ppm, Frequency Tolerance=0.001%, LCSC=C255973, Load Capacitance=9pF, Manufacturer=Epson, Manufacturer Part Number="FA-20H 40.0000MF20X-AC3", Max Operating Temperature=85°C, Min Operating Temperature=-40°C, Supplier Part Number=FA-20H40.0000MF20X-AC3-ND, Category=Crystals, China RoHS=Compliant, ComponentLink1Description=https://datasheet.octopart.com:443/FA-20H-40.0000MF20X-AC3-Epson-datasheet-62043847.pdf?src-supplier=IHS, ComponentLink1URL=https://datasheet.octopart.com:443/FA-20H-40.0000MF20X-AC3-Epson-datasheet-62043847.pdf?src-supplier=IHS, ComponentLink2Description=https://datasheet.octopart.com:443/FA-20H40.0000MF20X-AC3-Epson-datasheet-189100293.pdf?src-supplier=Electro+Sonic, ComponentLink2URL=https://datasheet.octopart.com:443/FA-20H40.0000MF20X-AC3-Epson-datasheet-189100293.pdf?src-supplier=Electro+Sonic, ComponentLink3Description=http://sigma.octopart.com:80/149134829/reach_statement/Epson-FA-20H-40.0000MF20X-AC3.pdf?src-supplier=Compliance+Statements, ComponentLink3URL=http://sigma.octopart.com:80/149134829/reach_statement/Epson-FA-20H-40.0000MF20X-AC3.pdf?src-supplier=Compliance+Statements, ComponentLink4Description=http://sigma.octopart.com:80/149134830/rohs_statement/Epson-FA-20H-40.0000MF20X-AC3.pdf?src-supplier=Compliance+Statements, ComponentLink4URL=http://sigma.octopart.com:80/149134830/rohs_statement/Epson-FA-20H-40.0000MF20X-AC3.pdf?src-supplier=Compliance+Statements, Contact Plating=Gold, ESR=40Ω, Frequency=40MHz, Height=558.8µm, Length=2.4892mm, Mounting Technology="Surface Mount", Packaging=Bulk, Pricing="250=0.98172 (USD)", REACH SVHC=Yes, RoHS=Compliant, Supplier=DigiKey, Width=2.0066mm

## Via types
v1: diameter 0.7, hole 0.3, L1-Sig to L4-Sig, tented both sides, 177 vias
v2: diameter 0.6, hole 0.25, L1-Sig to L4-Sig, tented both sides, 16 vias
v3: diameter 0.6/0.6/0.6/0.6 (per signal layer), hole 0.25, L1-Sig to L4-Sig, tented both sides, 1 vias

## Nets (pads, with @x,y where several pads share a name; then routed paths per layer and width w, separated by ;. In a path a pad name is that pad's centre, name@x,y a point inside that pad or via, vN(x,y) a via of type N, cw(c..) or ccw(c..) an arc to the next point about the centre after c; other vN are vias at no path point)
+3V3: C1.2 C2.2 C3.2 C4.2 C6.2 C7.2 C16.2 C18.2 C19.2 D3.A L2.2 R2.2 R3.2 R4.2 R11.2 U2.11 U2.17 U2.31 U2.32 U3.5 U4.3 U4.11 | length 125.4
  L1-Sig w0.25: U2.32 -2.771,-1.75 -3.023,-1.499 -3.073,-1.499 -2.825,-1.25 U2.31 ; U2.11 3.45,-0.75 3.7,-1 C2.2 ; C19.2 5.55,0.75 5.8,1 U4.11
  L1-Sig w0.3: U4.3 10.255,2 10.439,2.184 10.934,2.184 C18.2 ; R11.2 10.55,18.95 10.55,18.406 11.35,17.606 11.35,16.9 D3.A
  L1-Sig w0.4: U2.17 2.516,2.4 2.75,2.634 C3.2 C3.2@2.759,3.509
  L1-Sig w0.5: v1(-8.5,18.12) R2.2 ; v1@-5.041,-5.25 C1.2 ; v1(-4.418,-1.5) C4.2 -3.749,-1.499 -3.073,-1.499 ; L2.2 C6.2 -0.5,-7.704 -0.152,-8.052 1.707,-8.052 2,-7.759 C7.2 v1@2.791,-6.75 ; C3.2@2.759,3.509 v1@2.759,4.512 ; C2.2 3.767,-0.983 4.606,-0.983 v1(4.623,-0.966) ; v1(4.597,0.914) 4.652,0.914 4.766,0.8 5.45,0.8 C19.2 ; R4.2 v1(6.375,4.5) 7.336,5.461 9.169,5.461 11,3.63 C18.2 ; v1@8.5,-2.791 R3.2 ; U3.5 9.625,14.4 10.85,14.4 C16.2 10.986,14.264 10.986,15.379 v1(10.973,15.392) 11.011,15.431 11.131,15.431 11.478,15.778 11.478,16.728 D3.A
  L4-Sig w0.4: v1(2.769,4.521) 2.779,4.511 6.365,4.511 v1(6.375,4.5) 6.375,12.116 9.652,15.392 v1(10.973,15.392)
  L4-Sig w0.5: v1(-5.044,-5.253) -5.044,-2.18 -4.418,-1.554 v1(-4.418,-1.5) -4.418,7.517 -8.5,11.599 v1(-8.5,18.12) -6.148,20.472 8.458,20.472 10.973,17.958 v1(10.973,15.392) ; v1(2.769,4.521) 2.769,-0.043 ; v1(2.794,-6.747) 4.378,-6.747 5.836,-5.29 5.836,-3.556 ; v1(4.597,0.914) 4.623,0.889 4.623,-0.043 ; v1(4.623,-0.966) 4.623,-0.043 ; v1(8.503,-2.794) 8.471,-2.794 7.709,-3.556 5.836,-3.556 ; 2.769,-0.043 4.623,-0.043 ; 2.769,-0.043 2.769,-2.362 3.987,-3.581 5.418,-3.581 5.443,-3.556 5.836,-3.556
+VBUS: C15.2 D1.5 J1.A4B9 J1.B4A9 L1.1 | length 14.1
  L1-Sig w0.3: D1.5 -0.5,13.724 -0.238,13.462 0.254,13.462
  L1-Sig w0.4: 0.254,13.462 0.762,13.462
  L1-Sig w0.5: v1(-2.4,15.913) J1.B4A9 ; 0.762,13.462 1.05,13.75 C15.2 2.45,13.8 2.45,14.7 L1.1 2.45,14.8 2.45,15.809 2.4,15.859 J1.A4B9
  L4-Sig w0.5: v1(-2.4,15.913) v1(2.4,15.913)
+VBUS_FILT: C13.2 C14.2 C20.2 D2.5 J2.1 L1.2 U3.1 U3.3 | length 33.5
  L1-Sig w0.3: D2.5 -5.75,7.212 -5.926,7.036 -7.315,7.036 -7.747,7.468 -7.747,8.585 -9.296,10.135 -9.296,13.157 -8.579,13.875 J2.1 -7.288,13.887 -4.813,13.887 C20.2 ; U3.3 6.948,12.573 7.747,12.573 8.128,12.954 8.128,13.97 7.717,14.381 6.994,14.381 U3.1
  L1-Sig w0.5: C20.2 v1(-3.976,13.9) ; L1.2 3.55,14.7 3.55,13.8 C13.2 3.65,13.75 4.15,14.25 ; v1(4.47,15.113) 4.15,14.793 4.15,14.25 ; U3.1 6.875,14.4 5.65,14.4 C14.2 4.15,14.25
  L4-Sig w0.5: v1(-3.976,13.9) -3.271,14.605 3.962,14.605 v1(4.47,15.113)
ANT_RF: ANT1.1 C23.2 L3.2 | length 9.2
  L1-Sig w0.295: ANT1.1@-4.675,-12.688 cw(c-4.675,-12.663) -4.699,-12.663 -4.699,-9.322 cw(c-3.912,-9.322) -3.912,-8.534 -2.692,-8.534 ccw(c-2.692,-7.592) -1.75,-7.592 C23.2 L3.2
CHIP_EN: C10.2 R2.1 SW1.12 U2.7 | length 38.2
  L1-Sig w0.17: C10.2 -11.5,20.6 -11.575,20.675 -7.425,20.675 -7.5,20.6 R2.1 -7.493,18.993 v1(-7.493,17.729) ; U2.7 1.29,-2.44 1.29,-2.89 2.311,-3.912 v1@2.311,-4.267
  L4-Sig w0.17: v1(-7.493,17.729) -7.493,15.672 -2.845,11.024 -2.845,7.214 -1.422,5.791 -1.422,3.429 -0.406,2.413 1.219,2.413 1.88,1.753 1.88,-2.896 2.314,-3.33 v1(2.314,-4.265)
FSPI_CLK: R1.1 U4.8 | length 2.1
  L1-Sig w0.17: R1.1 7.25,-1.386 7.796,-0.84 8.185,-0.84 8.25,-0.775 U4.8
FSPI_D: U2.13 U4.9 | length 4.7
  L1-Sig w0.17: U2.13 4.749,0.25 4.999,0 U4.9
FSPI_NCS: U2.16 U4.14 | length 5.1
  L1-Sig w0.17: U2.16 2.944,1.75 4.039,2.845 6.045,2.845 6.39,2.5 U4.14
FSPI_NCS2: R3.1 U2.14 U4.5 | length 22.6
  L1-Sig w0.17: U2.14 3.417,0.75 v1(3.632,0.965) ; U4.5 9.485,0.935 9.128,0.935 8.788,0.596 8.788,-0.457 9.5,-1.169 R3.1 v1(10.49,-2)
  L4-Sig w0.17: v1(3.632,0.965) 3.632,2.032 4.407,2.807 6.922,2.807 7.595,3.48 7.595,4.674 8.103,5.182 9.373,5.182 9.83,4.724 9.83,0.22 10.49,-0.441 v1(10.49,-2)
FSPI_Q: R4.1 U2.6 U4.10 U4.15 | length 28.3
  L1-Sig w0.17: U2.6 0.75,-3.005 1.346,-3.601 v1@1.346,-3.962 ; R4.1 6.838,3.5 6.95,3.388 U4.15 6.991,2.959 7.455,2.959 8.433,1.981 8.433,1.245 7.688,0.5 ; v2(6.883,-0.66) 7.264,-0.66 7.688,-0.237 7.688,0.5 ; U4.10 7.688,0.5
  L4-Sig w0.17: v1(1.349,-3.96) 1.349,-7.115 2.083,-7.849 5.918,-7.849 9.271,-4.496 9.271,-1.524 8.407,-0.66 v2(6.883,-0.66)
GND: ANT1.2 C1.1 C2.1 C3.1 C4.1 C5.1 C6.1 C7.1 C8.1 C9.1 C10.1 C11.1 C12.1 C13.1 C14.1 C15.1 C16.1 C17.1 C18.1 C19.1 C20.1 C21.1 C22.1 C23.1 D1.2 D2.2 J1.A1B12 J1.B1A12 J2.3 J2.MP1 J2.MP2 R6.1 R7.1 R8.1 R9.1 R10.1 SW1.34 SW2.34 U1.4 U1.9 U2.33 U3.2 U4.2 U4.4 U4.6 U4.7 X1.2 X1.4 | length 48
  L1-Sig w0.25: v2(-1.295,13.513) -1.067,13.513 -0.675,13.121 -0.675,12.525 D1.2 ; v2(8.661,2.642) 8.803,2.5 U4.2
  L1-Sig w0.3: v1(-1.321,8.179) -0.75,8.179 U1.4 ; U4.7 10.382,0 10.611,0.229 v1(10.719,0.229) 10.63,0.229 10.358,0.5 U4.6 ; U4.4 10.184,1.5 10.465,1.219 10.969,1.219 C18.1
  L1-Sig w0.5: SW1.34@-11.575,22.825 v1(-10.414,22.825) ; C10.1 v1(-10.5,18.12) -10.5,16.725 J2.MP1 ; v1@-10.225,-2.716 X1.4 ; v1(-10.211,5.867) -10.211,7.564 J2.MP2 ; X1.2 v1@-8.775,0.716 ; v1(-8.585,22.825) SW1.34@-7.425,22.825 ; v1@-7.541,-1.5 C11.1 ; v1@-7.541,-0.5 C12.1 ; J2.3 -7.277,11.352 -5.967,11.352 v1(-5.944,11.328) ; D2.2 -5.745,5.845 -5.745,4.602 v1(-5.74,4.597) ; v1(-5.624,14.9) C20.1 ; v1@-5.041,-6.75 C1.1 ; v1@-3.75,-3.291 C4.1 ; v1(-3.556,16.002) -3.25,16.308 -3.25,17.35 J1.B1A12 ; C23.1 v1@-2.75,-5.959 ; v1@-2.75,-4.541 C22.1 ; C6.1 v1@0.5,-5.959 ; v1@0.5,-4.541 C5.1 ; C7.1 v1@2.791,-5.25 ; C8.1 v1(2,8.324) ; v1(2.4,11.926) C15.1 ; J1.A1B12 3.25,17.35 3.25,16.308 v1(3.556,16.002) ; C9.1 v1(3.5,8.574) ; v1(3.6,11.926) C13.1 ; C2.1 4.804,-2 4.975,-1.829 v1(5.029,-1.829) ; C3.1 3.753,3.503 4.544,3.503 v1(4.547,3.505) ; v1(4.681,1.865) 4.735,1.865 4.8,1.8 5.4,1.8 5.45,1.75 C19.1 ; v1(5.5,11.926) C14.1 5.6,12.75 6.3,13.45 6.875,13.45 U3.2 ; R7.1 v1(6.824,18) ; R6.1 6.037,22.787 7.387,22.787 7.425,22.825 v1(8.249,22.825) ; v1(6.676,16.75) R8.1 ; v1(7.926,11.25) C17.1 ; v1(8.5,18.176) C21.1 ; R9.1 v1@10.291,-6.75 ; R10.1 v1@10.291,-4.75 ; v1(10.751,22.825) SW2.34@11.575,22.825 ; C18.1 v1@11.791,1.25 ; v1(11,11.926) C16.1
  other v1: 0.152,-10.047 -11.494,-8.232 -10.494,-8.232 -9.494,-8.232 -8.494,-8.232 -7.494,-8.232 -6.494,-8.232 7.506,-8.232 8.506,-8.232 9.506,-8.232 10.506,-8.232 -11.994,-7.232 -10.994,-7.232 -9.994,-7.232 -8.994,-7.232 -7.994,-7.232 -6.994,-7.232 -5.994,-7.232 -5.044,-6.753 10.294,-6.747 -11.494,-6.232 -10.494,-6.232 -9.494,-6.232 -8.494,-6.232 -7.494,-6.232 -6.494,-6.232 -2.753,-5.956 0.497,-5.956 2.794,-5.247 -11.994,-5.232 -10.994,-5.232 -9.994,-5.232 -8.994,-5.232 -7.994,-5.232 -6.994,-5.232 10.294,-4.747 -2.747,-4.544 0.503,-4.544 -11.494,-4.232 -3.747,-3.294 -11.994,-3.232 -10.222,-2.719 -7.544,-1.503 -11.994,-1.232 -7.544,-0.503 -8.778,0.719 -11.994,0.768 11.794,1.253 -11.494,1.768 -11.994,2.768 -10.994,2.768 -9.994,2.768 -8.994,2.768 -7.994,2.768 -11.494,3.768 -10.494,3.768 -9.494,3.768 -8.494,3.768 -11.994,4.768 -10.994,4.768 -9.994,4.768 -8.994,4.768 -7.994,4.768 -11.494,5.768 -8.494,5.768 5.506,5.768 5.006,6.768 8.006,6.768 9.006,6.768 5.506,7.768 7.506,7.768 8.506,7.768 9.506,7.768 5.006,8.768 8.006,8.768 9.006,8.768 -11.494,9.768 -10.494,9.768 2.506,9.768 3.506,9.768 4.506,9.768 5.506,9.768 7.506,9.768 8.506,9.768 -11.994,10.768 -10.994,10.768 3.006,10.768 4.006,10.768 5.006,10.768 11.006,10.768 -11.494,11.768 -10.494,11.768 -11.994,12.768 -10.994,12.768 -2.994,12.768 -11.494,13.768 -10.494,13.768 -6.494,15.768 5.506,15.768 6.506,15.768 7.506,15.768 -5.994,16.768 -6.494,17.768 -5.994,18.768 -9.494,19.768 -11.494,21.768 -10.494,21.768 -9.494,21.768 -8.494,21.768 -7.494,21.768 -6.494,21.768 -2.494,21.768 -1.494,21.768 -0.494,21.768 0.506,21.768 1.506,21.768 2.506,21.768 7.506,21.768 8.506,21.768 10.506,21.768 -5.994,22.768 -2.994,22.768 -1.994,22.768 -0.994,22.768 0.006,22.768 1.006,22.768 2.006,22.768 3.006,22.768
  other v2: -1,-1 0,-1 1,-1 -1,0 0,0 1,0 -1,1 0,1 1,1
  other v3: -6.756,-10.439
INT_ACC: U2.10 U4.16 | length 13.6
  L1-Sig w0.17: U2.10 2.44,-1.29 2.839,-1.29 3.023,-1.473 3.023,-2.413 3.429,-2.819 4.107,-2.819 4.259,-2.667 4.489,-2.667 4.502,-2.68 4.986,-2.68 v1(5.087,-2.781) ; U4.16 8.25,3.775 8.75,4.275 v2(8.75,4.32)
  L4-Sig w0.17: v1(5.087,-2.781) 5.664,-2.204 5.664,0.66 8.75,3.746 v2(8.75,4.32)
INT_GYR_GPIO9: C21.2 R11.1 SW2.12 U2.15 U4.12 | length 49.7
  L1-Sig w0.17: U2.15 3.005,1.25 4.255,2.5 5.733,2.5 6.172,2.06 6.172,1.92 6.528,1.565 6.885,1.565 U4.12 6.975,1.525 7.823,1.525 v2(7.848,1.549) ; C21.2 7.425,19.075 7.425,20.675 9.5,20.675 ; v1(9.5,21.387) 9.5,20.675 ; R11.1 11.575,19.075 11.575,20.675 9.5,20.675
  L4-Sig w0.17: v2(7.848,1.549) 9.779,-0.382 9.779,-2.692 10.211,-3.124 11.684,-3.124 12.192,-2.616 12.192,-0.203 10.648,1.341 10.648,9.19 9.449,10.389 9.449,12.04 11.836,14.427 11.836,19.05 v1(9.5,21.387)
LDO_BYP: C17.2 U3.4 | length 1.4
  L1-Sig w0.5: U3.4 9.7,12.55 9.75,12.5 C17.2
LED_3V3_K: D3.K R8.2 | length 1.5
  L1-Sig w0.3: R8.2 D3.K
LED_A: D4.A U2.8 | length 6.4
  L1-Sig w0.17: U2.8 1.75,-2.625 2.859,-3.734 3.658,-3.734 4.521,-4.597 4.521,-5.671 5.5,-6.65 D4.A
LED_B: D5.A U2.9 | length 5.3
  L1-Sig w0.17: U2.9 2.4,-2.476 3.338,-3.414 4.163,-3.414 4.165,-3.416 4.991,-3.416 5.5,-3.925 D5.A
LNA_IN: C22.2 L3.1 U2.1 | length 2.4
  L1-Sig w0.295: L3.1 C22.2 U2.1
MCU_USB_D_N: D1.3 U2.25 | length 14.6
  L1-Sig w0.17: U2.25 -2.44,1.71 -2.745,1.71 -2.76,1.695 -3.005,1.695 -3.226,1.916 -3.226,1.963 -3.226,2.618 -3.112,2.732 -2.928,2.732 -2.814,2.846 -2.814,3.188 -2.928,3.302 -3.112,3.302 -3.226,3.416 -3.226,3.711 -3.226,9.973 -2.59,10.609 -0.809,10.609 -0.305,11.113 -0.305,11.415 -0.205,11.515 -0.085,11.515 0.45,12.05 D1.3
MCU_USB_D_P: D1.1 U2.26 | length 14.7
  L1-Sig w0.17: U2.26 -2.44,1.29 -2.745,1.29 -2.76,1.305 -3.167,1.305 -3.616,1.754 -3.616,10.135 -2.751,10.999 -0.97,10.999 -0.695,11.275 -0.695,11.415 -0.795,11.515 -0.915,11.515 -1.45,12.05 D1.1
NetC5_2: C5.2 L2.1 U2.2 U2.3 | length 3.6
  L1-Sig w0.25: U2.2 -1.25,-2.966 -1.041,-3.175 -0.75,-3.175 ; U2.3 -0.75,-3.175 ; L2.1 C5.2 -0.5,-3.7 -0.75,-3.45 -0.75,-3.175
NetD2_4: D2.4 J2.2 | length 6.3
  L1-Sig w0.17: J2.2 -5.919,12.625 -4.8,11.506 D2.4
NetD2_6: D2.6 J2.4 | length 3.9